# EAGLE board Helmet_Drop_V2.0 (EAGLE 9.6.2)
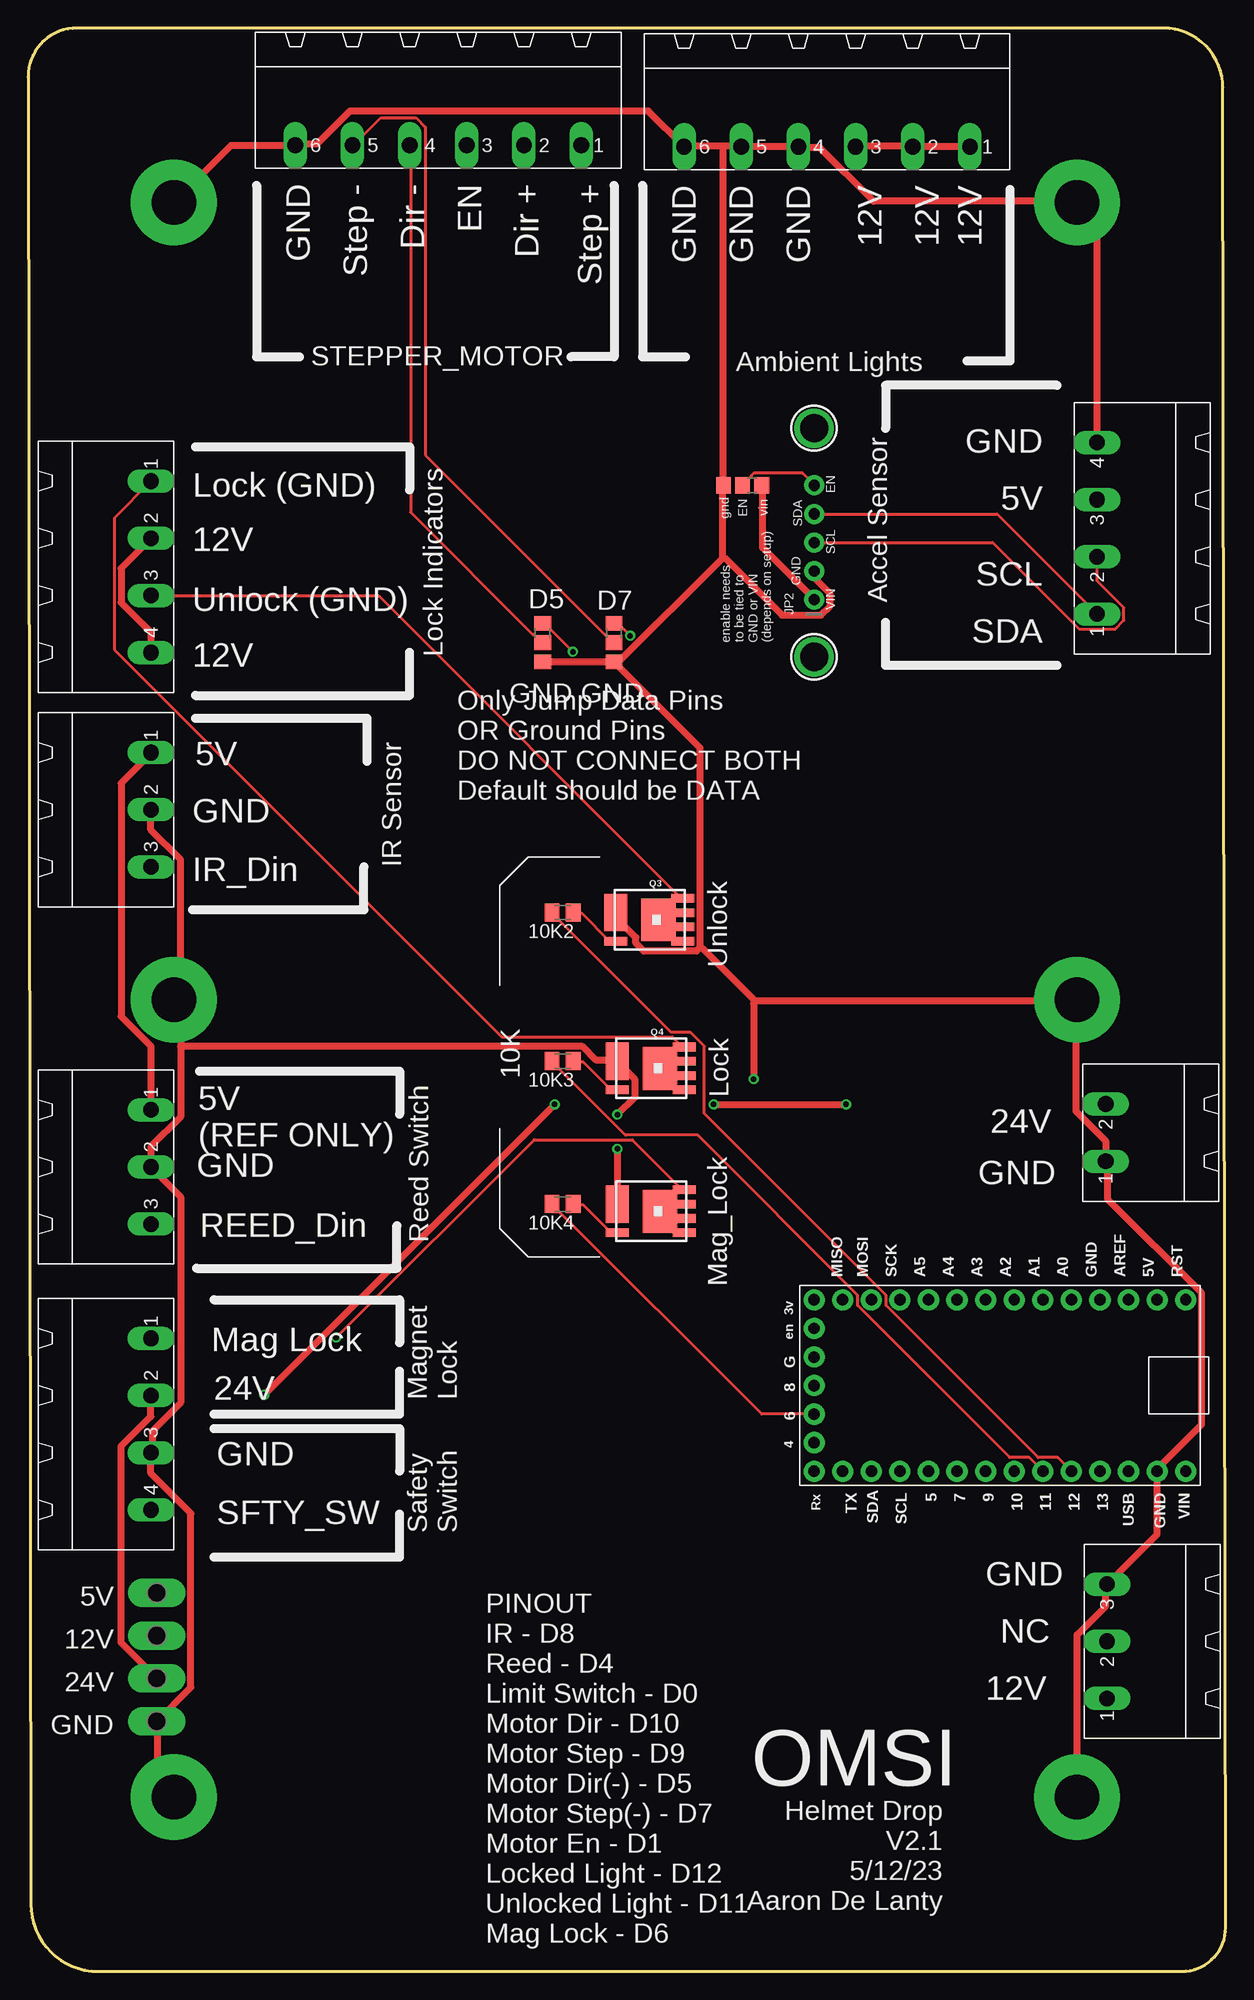
[diagram p0: board, top side]
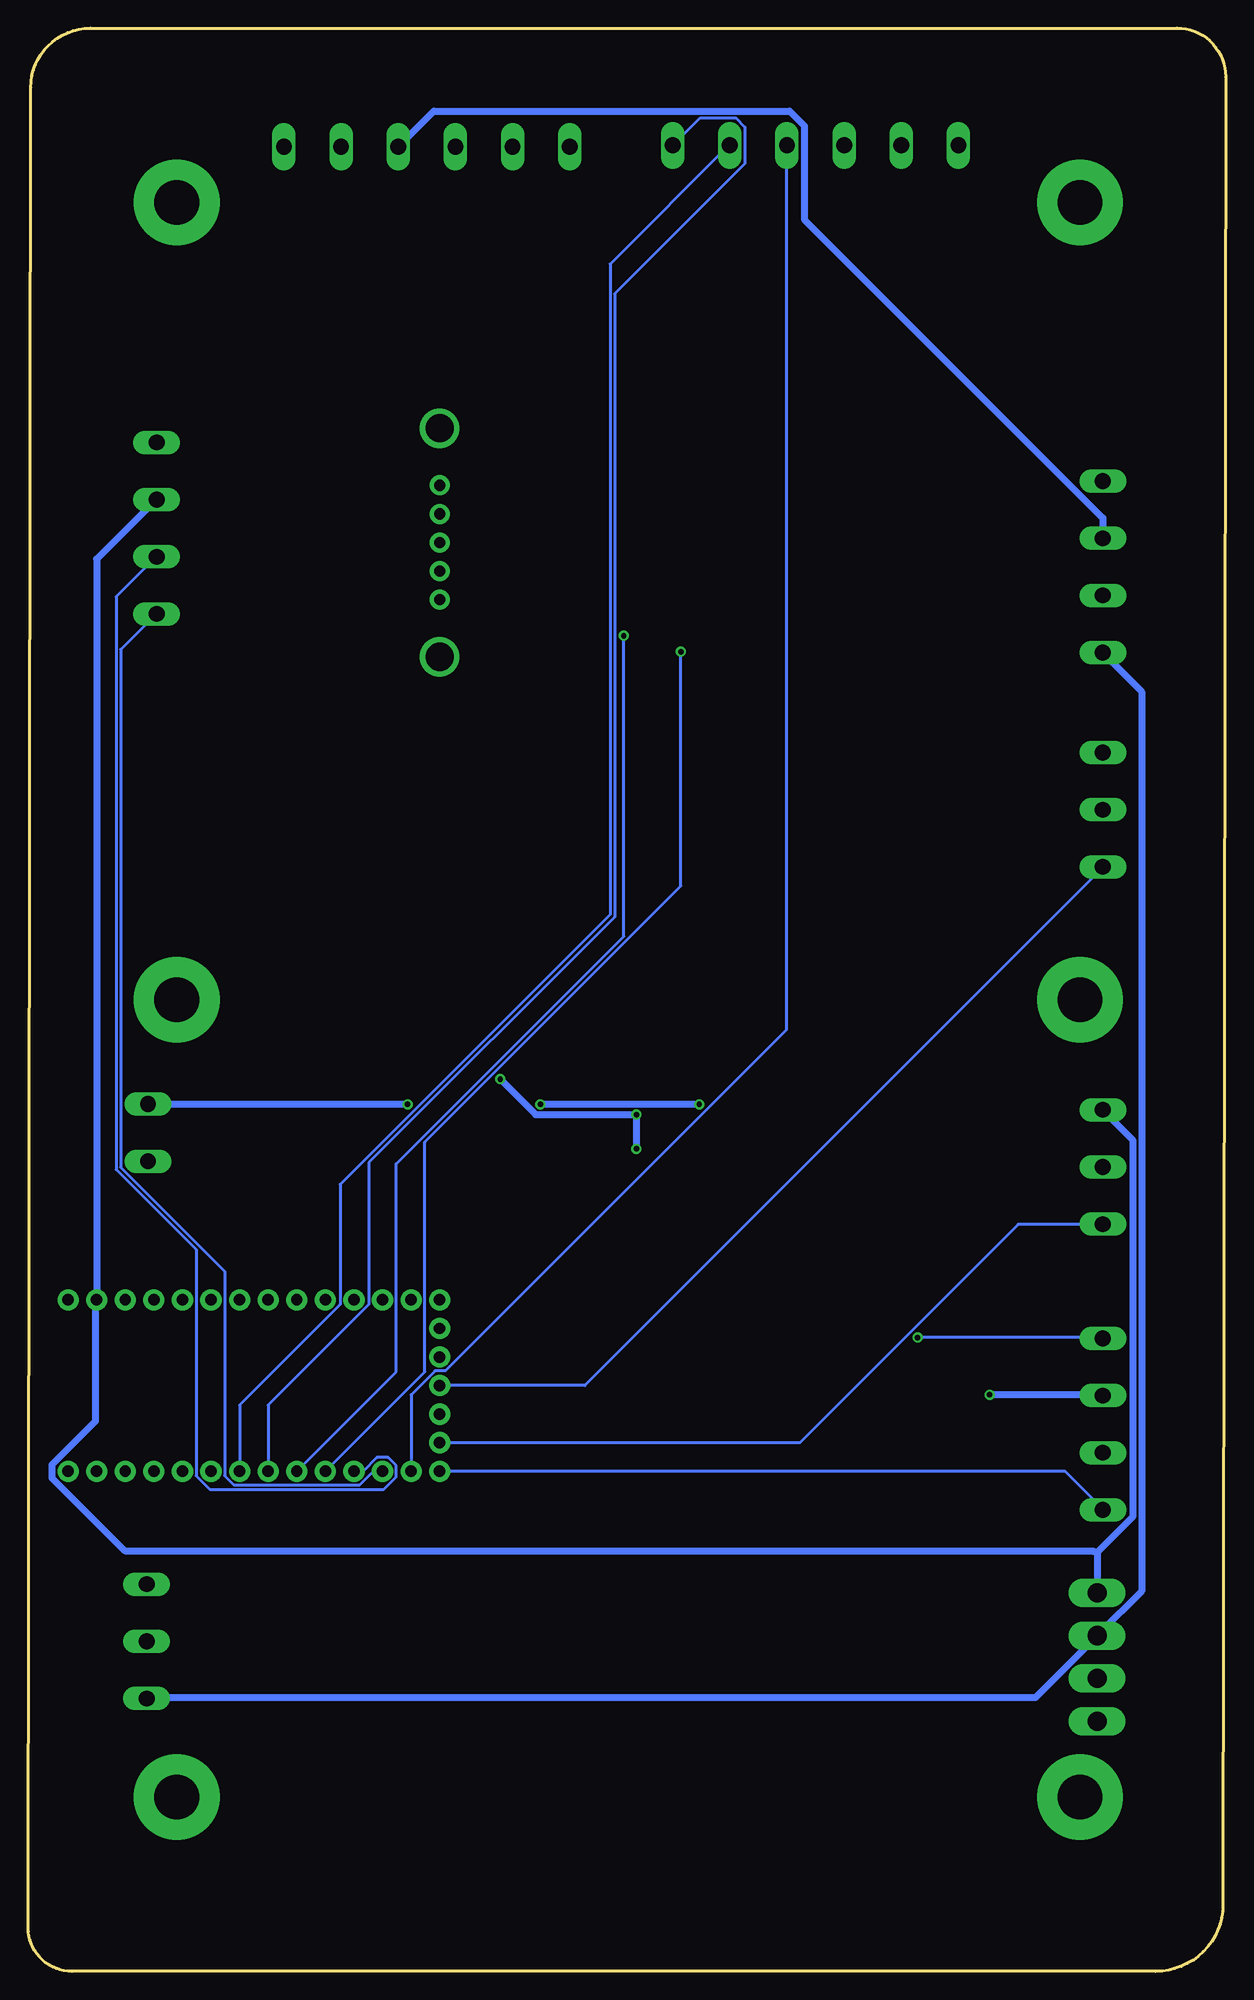
[diagram p1: board, bottom side, seen from below]

Size 106.41 x 172.72 mm. Coordinates in mm from the lower left corner, seen from the top.
Outline: 106.41,3.89 106.17,167.44 arc90 100.89,172.72 4.33,172.72 arc90 0,168.39 0.24,5.97 arc90 6.22,0 102.53,0 arc90 106.41,3.89
Copper layers (1*16): Top 0.035mm / dielectric 1.5mm / Bottom 0.035mm
Design rules "default *": minimum track width 10mil, minimum drill 0.35mm, track to track 6mil, track to pad 6mil, pad to pad 6mil, via to via 6mil, smd to smd 6mil, copper to edge 40mil, drill to drill 6mil, minimum pad ring 10mil, minimum via ring 8mil, stop-mask expansion 4mil, vias tented up to drill 0mil, thermal gap 10mil
Net classes: 1 highpower: width 0.635 mm, drill 0.483 mm, clearance 0.127 mm; 2 Low Power: width 0.254 mm, drill 0.483 mm

## Footprints (pad centres in the part's own frame; a part is rotated, then mirrored left to right if it is on the bottom)
M0805 = smd 1.3 x 1.6: 1 -0.95,0; 2 0.95,0
MSTBA3 = drill 1.397 long: 1 -5.08,5.08; 2 0,5.08; 3 5.08,5.08
MSTBA2 = drill 1.397 long: 1 -2.54,5.08; 2 2.54,5.08
MSTBA6 = drill 1.397 long: 1 -12.7,5.08; 2 -7.62,5.08; 3 -2.54,5.08; 4 2.54,5.08; 5 7.62,5.08; 6 12.7,5.08
B0R-JMP = smd 1.5 x 1.3: 1 0,1.7; 2 0,0; 3 0,-1.7
A0R-JMP = smd 1.5 x 1.3: 1 0,1.7; 2 0,0; 3 0,-1.7
1X05_ROUND_70 = drill 1 pad 1.778: 1 -5.08,0; 2 -2.54,0; 3 0,0; 4 2.54,0; 5 5.08,0
MSTBA4 = drill 1.397 long: 1 -7.62,5.08; 2 -2.54,5.08; 3 2.54,5.08; 4 7.62,5.08
SO-8_POWER_PAK = smd 0.762 x 2.032: D1 -3.423,2.437; D2 -2.153,2.437; D3 -0.883,2.437; D4 0.387,2.437; G 0.387,-3.532 | smd 3.81 x 3.048: D5 -1.518,0.278 | smd 3.302 x 2.032: S -2.153,-3.532
STANDOFF_ELECTRICAL_5_32 = drill 3.969 pad 7.62: P1 0,0
P2-38-17 = drill 1.702 pad 2.121 long: TP-1 -1.905,0; TP-2 1.905,0
TH_DS_LIBRARIES_ADAFRUIT_LENOARDO = drill 1.016 pad 1.88: 3V -10.16,-21.59; 5V -10.16,8.89; A0 -10.16,1.27; A1 -10.16,-1.27; A2 -10.16,-3.81; A3 -10.16,-6.35; A4 -10.16,-8.89; A5 -10.16,-11.43; AREF -10.16,6.35; D4 2.54,-21.59; D5 5.08,-11.43; D6 0,-21.59; D7 5.08,-8.89; D8 -2.54,-21.59; D9 5.08,-6.35; D10 5.08,-3.81; D11 5.08,-1.27; D12 5.08,1.27; D13 5.08,3.81; EN -7.62,-21.59; GND@0 -10.16,3.81; GND@1 -5.08,-21.59; GND@2 5.08,8.89; MISO -10.16,-19.05; MOSI -10.16,-16.51; RES -10.16,11.43; RX 5.08,-21.59; SCK -10.16,-13.97; SCL 5.08,-13.97; SDA 5.08,-16.51; TX 5.08,-19.05; USB 5.08,6.35; VIN 5.08,11.43
MOUNTINGHOLE_2.5_PLATED = drill 2.5 pad 3.2: P$1 0,0
TH_DS_LIBRARIES_MSTBA4 = drill 1.397 long: 1 -7.62,5.08; 2 -2.54,5.08; 3 2.54,5.08; 4 7.62,5.08

## Placement (x,y rotation side)
10K2  [M0805]  47.49,94.11 180 top
10K3  [M0805]  47.49,80.9 180 top
10K4  [M0805]  47.49,68.2 180 top
12V_IN  MSTBA3  [MSTBA3]  100.96,29.34 90 top
24V  MSTBA2  [MSTBA2]  100.83,74.55 90 top
AUXILLARY_LIGHTS1  MSTBA6  [MSTBA6]  70.99,167.26 180 top
IR_IN  MSTBA3  [MSTBA3]  5.84,103.25 270 top
JMP1  0R-JUMPB  [B0R-JMP]  45.71,118.11 180 top
JMP2  0R-JUMPB  [B0R-JMP]  52.06,118.11 180 top
JMP3  0R-JUMPA  [A0R-JMP]  63.49,132.08 270 top
JP2  [1X05_ROUND_70]  69.84,127 90 top
LOCK_LIGHTS  MSTBA4  [MSTBA4]  5.84,124.84 270 top
Q3  MOSFET-NCH  [SO-8_POWER_PAK]  55.75,91.95 270 top
Q4  MOSFET-NCH  [SO-8_POWER_PAK]  55.87,78.74 270 top
Q5  MOSFET-NCH  [SO-8_POWER_PAK]  55.87,66.04 270 top
REED_IN  MSTBA3  [MSTBA3]  5.84,71.5 270 top
S5  STANDOFF_ELECTRICAL5-32  [STANDOFF_ELECTRICAL_5_32]  93.21,157.23 270 top
S7  STANDOFF_ELECTRICAL5-32  [STANDOFF_ELECTRICAL_5_32]  12.95,86.36 270 top
S9  STANDOFF_ELECTRICAL5-32  [STANDOFF_ELECTRICAL_5_32]  12.95,157.23 270 top
S10  STANDOFF_ELECTRICAL5-32  [STANDOFF_ELECTRICAL_5_32]  93.21,86.36 270 top
S11  STANDOFF_ELECTRICAL5-32  [STANDOFF_ELECTRICAL_5_32]  12.95,15.49 270 top
S12  STANDOFF_ELECTRICAL5-32  [STANDOFF_ELECTRICAL_5_32]  93.21,15.49 270 top
STEPPER_MOTOR  MSTBA6  [MSTBA6]  36.44,167.39 180 top
TP1  PTR2  [P2-38-17]  11.42,24.13 270 top
TP2  PTR2  [P2-38-17]  11.42,31.75 270 top
U1  TH_DS_LIBRARIES_ITSYBITSY_5V  [TH_DS_LIBRARIES_ADAFRUIT_LENOARDO]  91.43,49.53 270 top
U$19  MOUNTINGHOLE2.5  [MOUNTINGHOLE_2.5_PLATED]  69.84,116.84 90 top
U$21  MOUNTINGHOLE2.5  [MOUNTINGHOLE_2.5_PLATED]  69.84,137.16 90 top
X1  MSTBA4  [MSTBA4]  5.84,48.64 270 top
X2  TH_DS_LIBRARIES_MSTBA4  [TH_DS_LIBRARIES_MSTBA4]  100.07,128.27 90 top

## Library data of the parts
10K2-10K4 = adafruit
12V_IN IR_IN REED_IN = con-phoenix-508; MF: FARNELL; MPN: 1757255; OC_FARNELL: 3705183; OC_NEWARK: 71C4162
24V = th_libraries; MF: FARNELL; MPN: 1757242; OC_FARNELL: 3705171; OC_NEWARK: 71C4161
AUXILLARY_LIGHTS1 STEPPER_MOTOR = con-phoenix-508; MF: FARNELL; MPN: 1757284; OC_FARNELL: 3705213; OC_NEWARK: 71C4165
JMP1-JMP3 = jump-0r-smd
JP2 = microbuilder
LOCK_LIGHTS = th_libraries; MF: FARNELL; MPN: 1757268; OC_FARNELL: 3705195; OC_NEWARK: 71C4163
Q3-Q5 = th_ds_libraries
S5 S7 S9-S12 = th_libraries
TP1 TP2 = testpad
U1 = Helmet_Drop_V1.5
U$19 U$21 = microbuilder; BOM: EXCLUDE
X1 = con-phoenix-508; MF: FARNELL; MPN: 1757268; OC_FARNELL: 3705195; OC_NEWARK: 71C4163
X2 = OMSI_Default_V1; MF: FARNELL; MPN: 1757268; OC_FARNELL: 3705195; OC_NEWARK: 71C4163

## Nets
5V [highpower]: IR_IN.1 REED_IN.1 TP2.TP-1 U1.5V X2.3
12V [highpower]: 12V_IN.1 AUXILLARY_LIGHTS1.1 AUXILLARY_LIGHTS1.2 AUXILLARY_LIGHTS1.3 LOCK_LIGHTS.2 LOCK_LIGHTS.4 TP2.TP-2
24V [highpower]: 24V.2 TP1.TP-1 X1.2
D0 [Low Power]: U1.RX X1.4
D1 [Low Power]: STEPPER_MOTOR.3 U1.TX
D4 [Low Power]: REED_IN.3 U1.D4
D5 [Low Power]: JMP1.3 U1.D5
D5J [Low Power]: JMP1.2 STEPPER_MOTOR.4
D7 [Low Power]: JMP2.3 U1.D7
D7J [Low Power]: JMP2.2 STEPPER_MOTOR.5
D8 [Low Power]: IR_IN.3 U1.D8
D9 [Low Power]: STEPPER_MOTOR.1 U1.D9
D10 [Low Power]: STEPPER_MOTOR.2 U1.D10
D11 [Low Power]: 10K3.2 U1.D11
D12 [Low Power]: 10K2.2 U1.D12
EN [Low Power]: JMP3.2 JP2.5
GND [highpower]: 12V_IN.3 24V.1 AUXILLARY_LIGHTS1.4 AUXILLARY_LIGHTS1.5 AUXILLARY_LIGHTS1.6 IR_IN.2 JMP1.1 JMP2.1 JMP3.3 JP2.2 Q3.S Q4.S Q5.S REED_IN.2 S5.P1 S7.P1 S9.P1 S10.P1 S11.P1 S12.P1 STEPPER_MOTOR.6 TP1.TP-2 U1.GND@2 X1.3 X2.4
N$1 [Low Power]: 10K4.2 U1.D6
N$7 [Low Power]: LOCK_LIGHTS.3 Q3.D1
N$10 [Low Power]: LOCK_LIGHTS.1 Q4.D1
N$12 [Low Power]: 10K2.1 Q3.G
N$21 [Low Power]: Q5.D1 X1.1
N$27 [Low Power]: 10K3.1 Q4.G
N$28 [Low Power]: 10K4.1 Q5.G
SCL [Low Power]: JP2.3 U1.SCL X2.2
SDA [Low Power]: JP2.4 U1.SDA X2.1
VCC [highpower]: JMP3.1 JP2.1

## Tracks (layer width: path | path; a pad name or v marks a point on that pad's centre or on a via)
5V
  Top 0.635: REED_IN.1 10.92,82.25 8.27,84.89 8.27,105.61 10.92,108.26 IR_IN.1
  Bottom 0.635: X2.3 95.04,130.81 100.32,125.53 U1.5V 100.43,59.38 100.43,48.92 104.29,45.06 104.29,43.84 97.78,37.34 11.73,37.34 11.42,37.24 | 11.42,37.24 TP2.TP-1 | 11.42,37.24 8.27,40.39 8.27,73.91 10.92,76.56 REED_IN.1
12V
  Top 0.635: LOCK_LIGHTS.4 10.92,119.02 8.27,121.67 8.27,124.71 10.92,127.36 LOCK_LIGHTS.2 | AUXILLARY_LIGHTS1.3 73.6,162.2 78.58,162.2 AUXILLARY_LIGHTS1.2 78.89,162.2 83.66,162.2 AUXILLARY_LIGHTS1.1
  Bottom 0.635: 12V_IN.1 95.85,24.33 16.91,24.33 11.42,29.82 TP2.TP-2 11.22,30.02 7.46,33.78 7.46,113.74 10.92,117.2 LOCK_LIGHTS.4 | LOCK_LIGHTS.2 10.92,129.18 37.43,155.7 37.43,164.03 38.75,165.35 70.35,165.35 AUXILLARY_LIGHTS1.3
24V  (via drill 0.48)
  Top 0.635: X1.2 10.92,49.33 8.27,46.68 8.27,29.21 11.42,26.06 TP1.TP-1 | v60.9,77.06 v72.69,77.06 | v20.97,51.26 v46.78,77.06
  Bottom 0.635: v72.69,77.06 95.75,77.06 24V.2 | v46.78,77.06 v60.9,77.06 | v20.97,51.26 10.92,51.26 X1.2
D0
  Bottom 0.254: U1.RX 14.27,44.45 10.92,41.1 X1.4
D1
  Bottom 0.254: U1.TX 72.38,51.26 70.25,53.39 69.34,53.39 39.06,83.67 39.06,162.31 STEPPER_MOTOR.3
D4
  Bottom 0.254: U1.D4 37.84,46.99 18.43,66.4 10.92,66.4 REED_IN.3
D5  (via drill 0.48)
  Top 0.254: v48.41,117.3 45.97,119.74 45.76,119.74 JMP1.3
  Bottom 0.254: v48.41,117.3 48.41,96.47 71.16,73.71 71.16,53.29 U1.D5
D5J
  Top 0.254: JMP1.2 45.66,118.11 44.95,118.82 44.85,118.82 33.98,129.69 33.98,162.31 STEPPER_MOTOR.4
D7  (via drill 0.48)
  Top 0.254: v53.49,118.72 52.47,119.74 52.06,119.74 JMP2.3
  Bottom 0.254: v53.49,118.72 53.49,92 73.7,71.78 73.7,53.29 U1.D7
D7J
  Top 0.254: JMP2.2 51.35,118.82 51.25,118.82 35.3,134.77 35.3,163.93 34.49,164.74 31.34,164.74 28.9,162.31 STEPPER_MOTOR.5
D8
  Bottom 0.254: U1.D8 56.94,52.07 10.92,98.09 IR_IN.3
D9
  Bottom 0.254: U1.D9 85.08,50.34 76.14,59.28 76.14,71.88 54.3,93.73 54.3,149.1 42.72,160.68 42.72,163.93 43.53,164.74 46.68,164.74 49.12,162.31 STEPPER_MOTOR.1
D10
  Bottom 0.254: U1.D10 87.62,50.34 78.68,59.28 78.68,69.95 54.71,93.93 54.71,151.74 44.14,162.31 STEPPER_MOTOR.2
D11
  Top 0.254: U1.D11 88.94,45.67 87.22,45.67 73.7,59.18 73.7,60.1 59.48,74.32 53.08,74.32 46.58,80.82 10K3.2
D12
  Top 0.254: U1.D12 91.48,45.67 89.76,45.67 76.24,59.18 76.24,60.1 60.09,76.25 60.09,82.25 58.87,83.46 57.14,83.46 46.58,94.03 10K2.2
EN
  Top 0.254: JMP3.2 64.26,132.84 64.26,132.94 64.46,133.15 68.83,133.15 69.84,132.13 JP2.5
GND  (via drill 0.48)
  Top 0.635: S11.P1 11.53,16.92 11.53,21.89 TP1.TP-2 11.42,22.2 14.47,25.25 14.47,40.69 10.92,44.25 X1.3 11.02,46.38 11.02,48.01 13.56,50.55 13.56,68.83 11.12,71.27 REED_IN.2 10.92,73.3 13.56,75.95 13.56,82.25 | v52.37,73.1 52.37,68.22 Q5.S | v52.37,76.15 53.89,77.67 53.89,79.3 52.37,80.82 Q4.S 52.06,81.03 50.44,81.03 49.22,82.25 13.56,82.25 | 13.56,82.25 13.56,85.7 12.95,86.31 S7.P1 13.05,86.61 13.56,87.12 13.56,98.81 10.92,101.45 IR_IN.2 | S12.P1 93.21,29.92 95.75,32.46 95.75,34.19 12V_IN.3 100.32,38.86 U1.GND@2 100.43,44.75 104.29,48.62 104.29,60.3 95.95,68.63 95.95,71.78 24V.1 95.75,73.81 93.11,76.45 93.11,86.21 93.21,86.31 S10.P1 92.81,86.31 64.56,86.31 | JMP1.1 45.76,116.38 52.06,116.38 JMP2.1 | 61.72,125.63 61.72,132.03 JMP3.3 61.72,132.33 61.72,162.2 | 61.72,125.63 52.37,116.28 JMP2.1 | 59.68,90.98 59.38,90.68 54.71,90.68 53.99,91.39 53.99,91.9 52.27,93.62 52.27,94.03 Q3.S | 59.68,90.98 59.68,108.76 52.47,115.98 JMP2.1 | JP2.2 69.84,123.9 71.27,122.48 71.27,121.36 70.45,120.55 67,120.55 62.02,125.53 61.72,125.63 | S9.P1 18.03,162.31 STEPPER_MOTOR.6 24.02,162.41 25.65,162.41 28.59,165.35 55.11,165.35 AUXILLARY_LIGHTS1.6 58.36,162.2 61.72,162.2 | 61.72,162.2 63.34,162.2 AUXILLARY_LIGHTS1.5 63.65,162.2 68.42,162.2 AUXILLARY_LIGHTS1.4 68.73,162.1 70.35,162.1 75.13,157.33 92.91,157.33 S5.P1 94.94,155.5 94.94,135.89 X2.4 | 64.56,86.31 59.99,90.88 59.68,90.98 | v64.46,79.3 64.46,86 64.56,86.31
  Bottom 0.635: v52.37,73.1 v52.37,76.15 61.31,76.15 v64.46,79.3
N$1
  Top 0.254: U1.D6 65.17,49.53 46.58,68.12 10K4.2
N$7
  Top 0.254: Q3.D1 58.16,95.45 57.96,95.45 31.13,122.28 10.92,122.28 LOCK_LIGHTS.3
N$10
  Top 0.254: Q4.D1 58.26,82.25 58.06,82.25 57.25,83.06 42.11,83.06 7.66,117.5 7.66,129.18 10.92,132.44 LOCK_LIGHTS.1
N$12
  Top 0.254: 10K2.1 48.51,94.03 49.22,94.03 51.66,91.59 52.17,91.59 Q3.G
N$21  (via drill 0.48)
  Top 0.254: v27.37,56.34 44.95,73.91 53.69,73.91 58.06,69.55 58.26,69.55 Q5.D1
  Bottom 0.254: v27.37,56.34 10.92,56.34 X1.1
N$27
  Top 0.254: 10K3.1 48.51,80.82 49.32,80.82 51.76,78.38 52.27,78.38 Q4.G
N$28
  Top 0.254: 10K4.1 48.51,68.12 49.32,68.12 51.76,65.68 52.27,65.68 Q5.G
SCL
  Top 0.254: JP2.3 85.71,127 93.39,119.32 96.59,119.32 97.36,120.1 97.36,121.2 94.99,123.58 X2.2
  Bottom 0.254: U1.SCL 76.65,44.45 75.43,45.67 74.42,45.67 73.7,44.96 73.7,43.94 74.82,42.82 90.27,42.82 91.48,44.04 91.48,64.16 98.6,71.27 98.6,122.17 95.04,125.73 X2.2
SDA
  Top 0.254: JP2.4 86.1,129.54 X2.1
  Bottom 0.254: U1.SDA 75.74,44.45 76.96,43.23 88.13,43.23 88.94,44.04 88.94,62.23 98.19,71.48 98.19,117.5 95.04,120.65 X2.1
VCC
  Top 0.635: JMP3.1 65.27,132.03 65.27,126.54 69.84,121.97 JP2.1

## Text on the board
tPlace: EN | SDA | SCL | GND | VIN
tNames: GND | Step - | Dir - | EN | Dir + | Step + | GND | GND | GND | 12V | 12V | 12V | Ambient Lights | GND | 5V | Lock (GND) | gnd | EN | vin | 12V | SCL | D5 | D7 | Accel Sensor | Unlock (GND) | SDA | enable needs / to be tied to / GND or VIN / (depends on setup) | Lock Indicators | 12V | GND | GND | 5V | Only Jump Data Pins / OR Ground Pins / DO NOT CONNECT BOTH / Default should be DATA | GND | IR Sensor | IR_Din | Unlock | 10K | Lock | 24V | 5V / (REF ONLY) | Mag_Lock | GND | GND | REED_Din | Reed Switch | Mag Lock | 24V | Magnet / Lock | GND | SFTY_SW | Safety / Switch | 5V | GND | 12V | NC | 24V | 12V | GND | OMSI | Helmet Drop / V2.1 / 5/12/23 / Aaron De Lanty | PINOUT / IR - D8 / Reed - D4 / Limit Switch - D0 / Motor Dir - D10 / Motor Step - D9 / Motor Dir(-) - D5 / Motor Step(-) - D7 / Motor En - D1 / Locked Light - D12 / Unlocked Light - D11 / Mag Lock - D6